# Altium PCB PDN Analyzer.PcbDoc
Units mm, origin at the board's own origin, x right, y up, seen from the top; angles counter-clockwise.
Board outline 36 x 21 mm, 4 copper layers (Top Layer, Top, Layer 1, Bottom Layer), stack 1.282 mm thick; 45 components, 30 nets, 140 pads, 90 vias.
Unrouted connection lines stored in the file: 10.
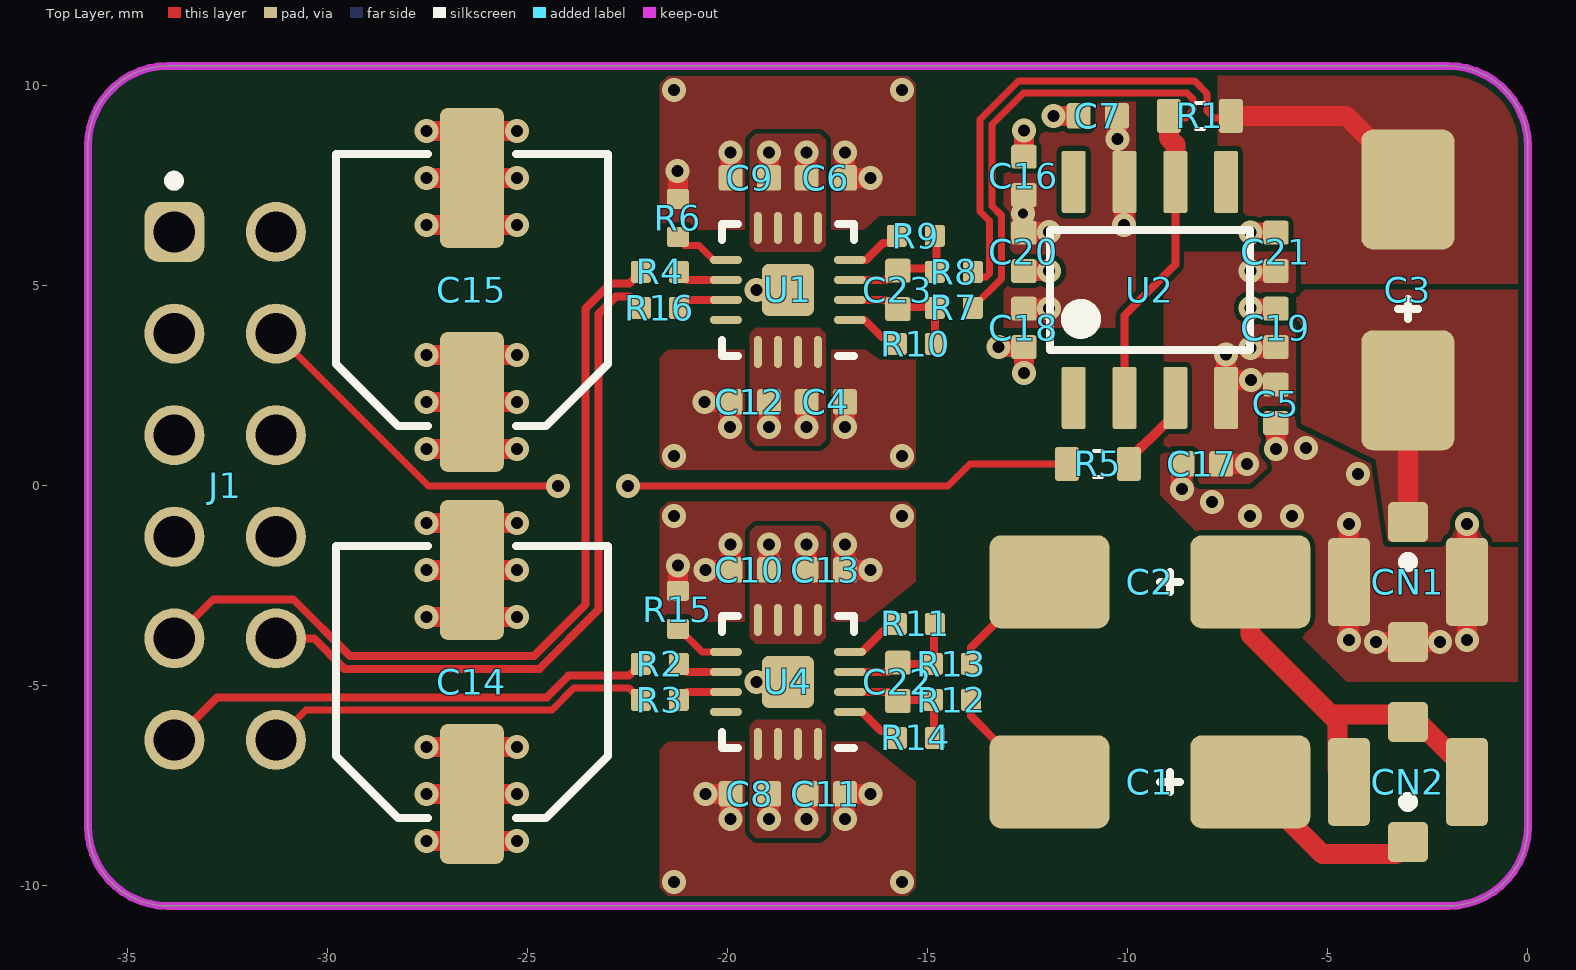
[diagram p0: Top Layer view]
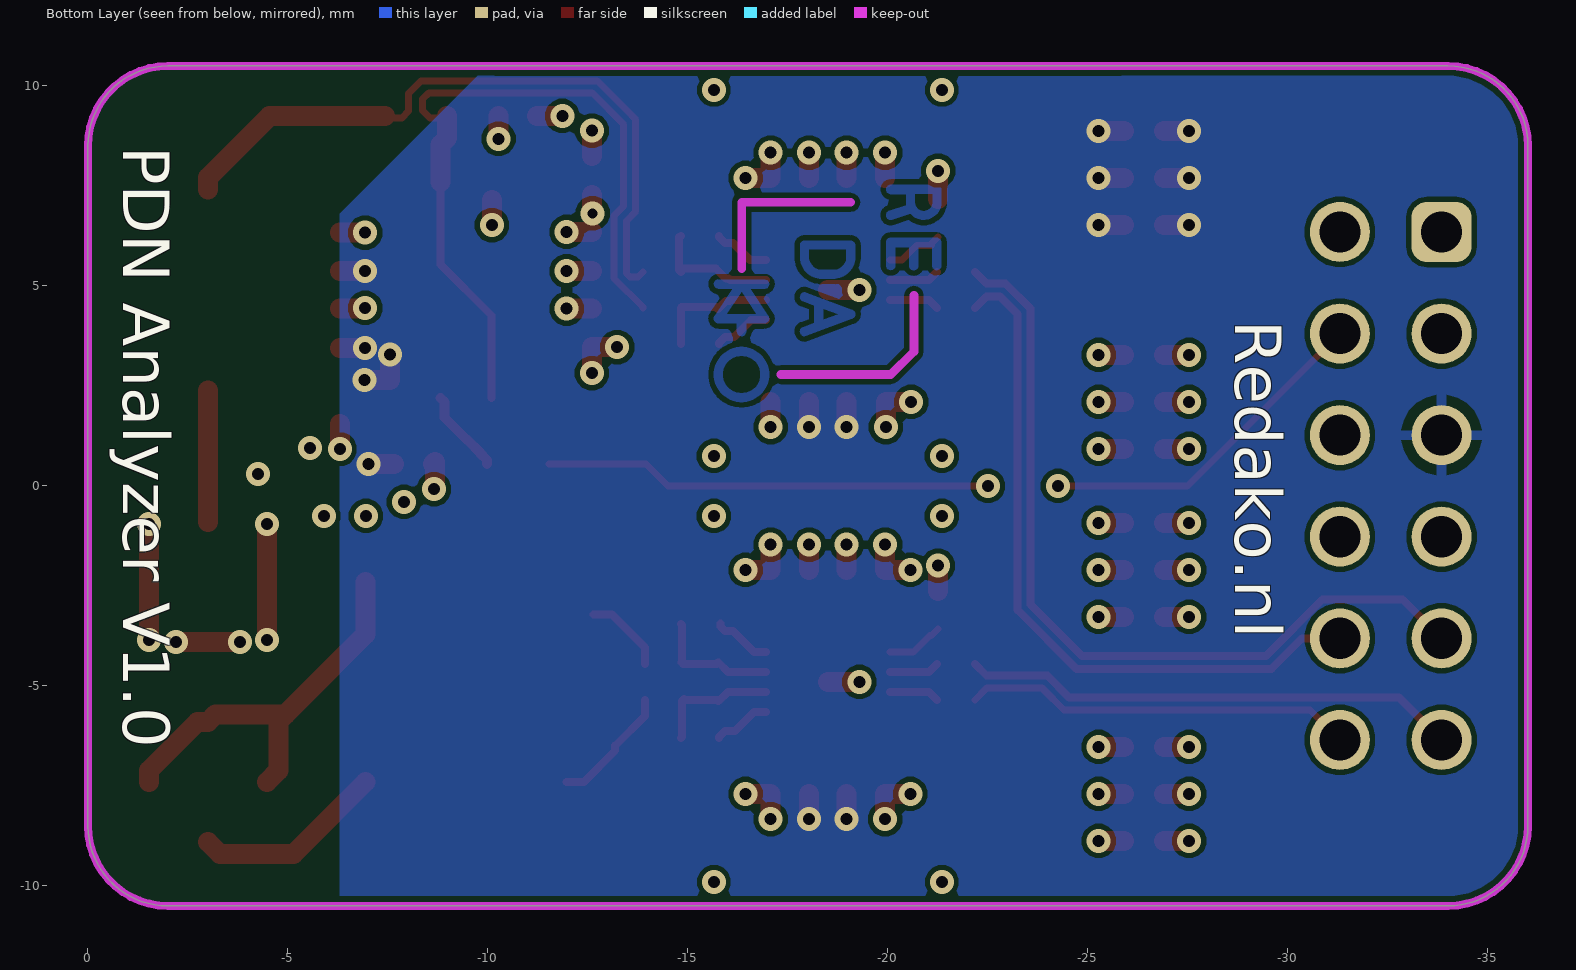
[diagram p1: Bottom Layer view, seen from below]
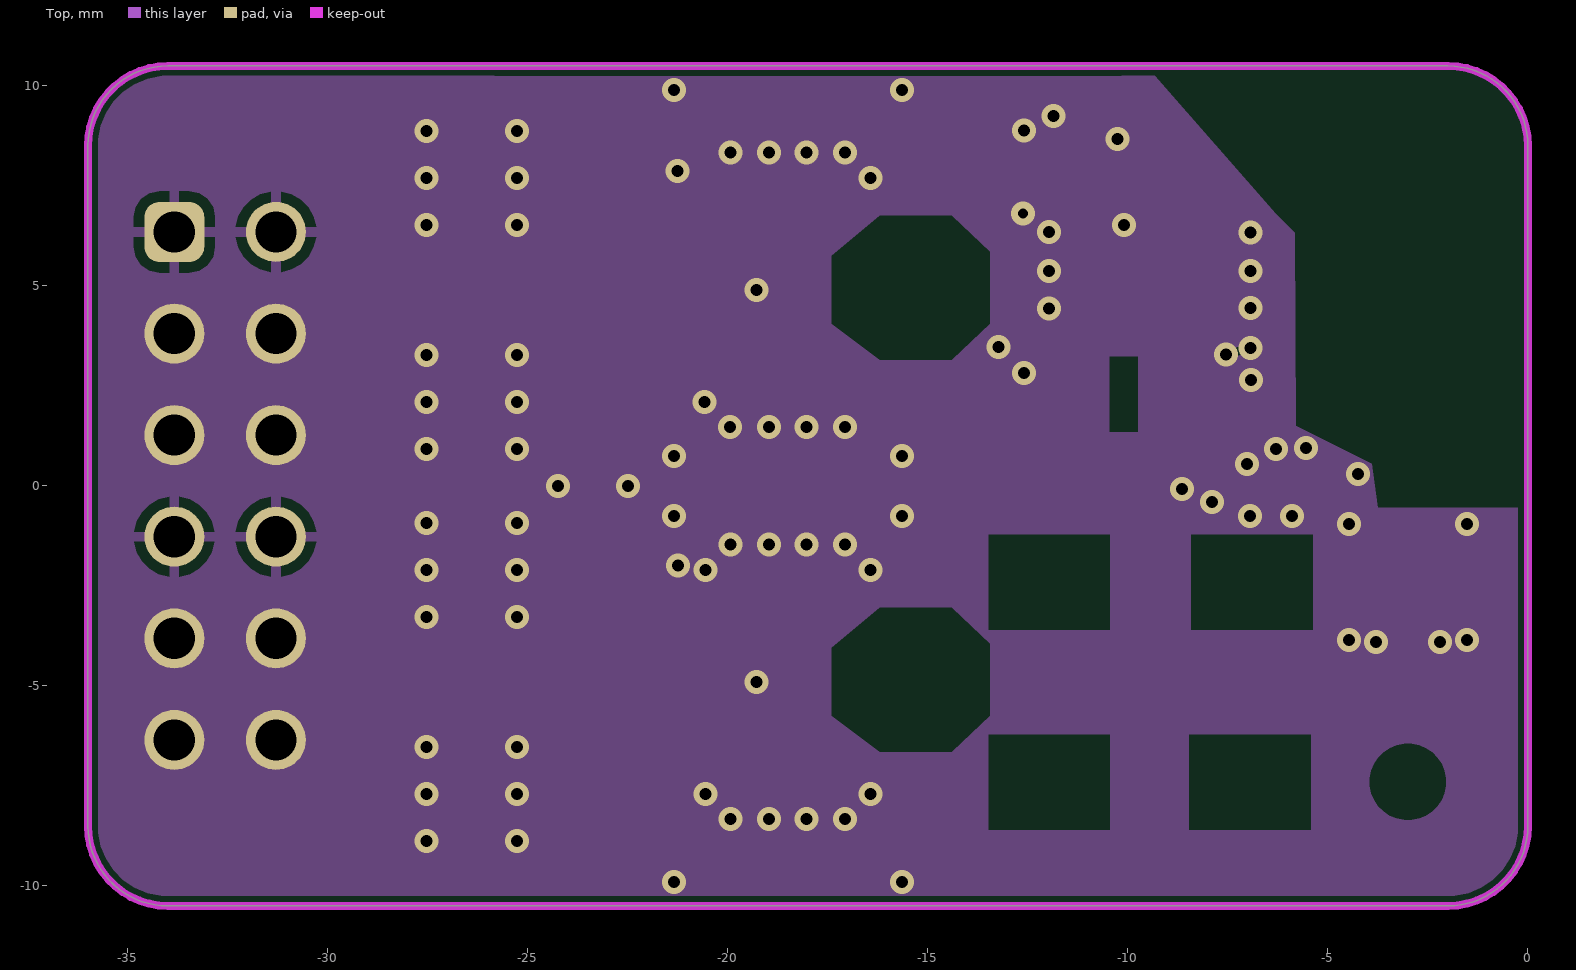
[diagram p2: Top]
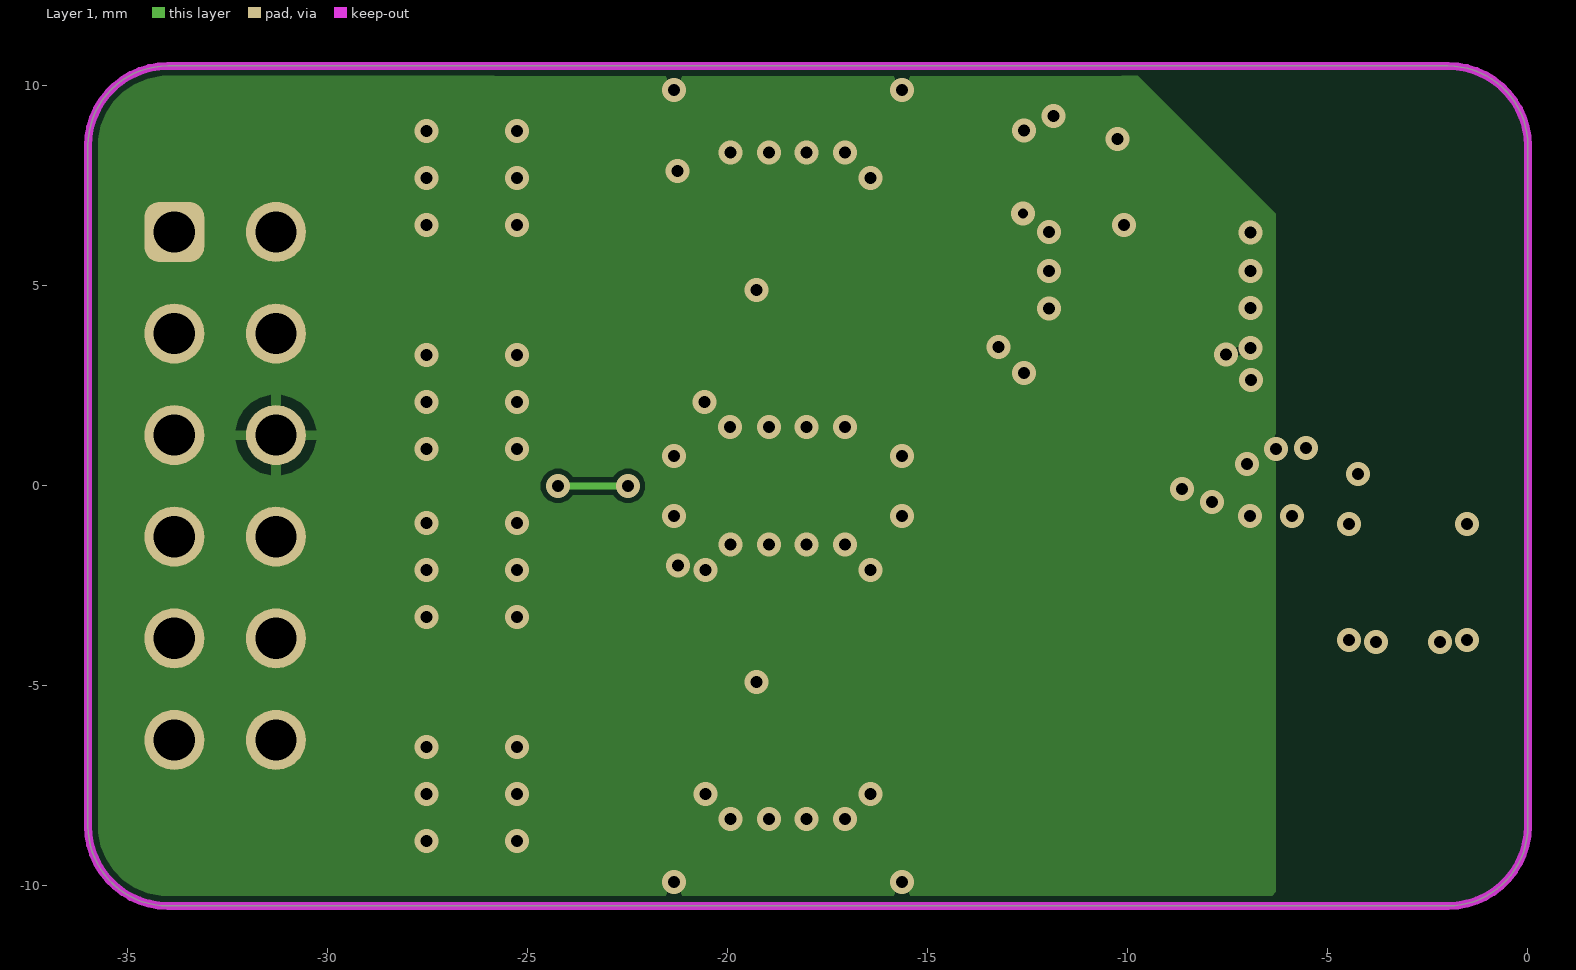
[diagram p3: Layer 1]
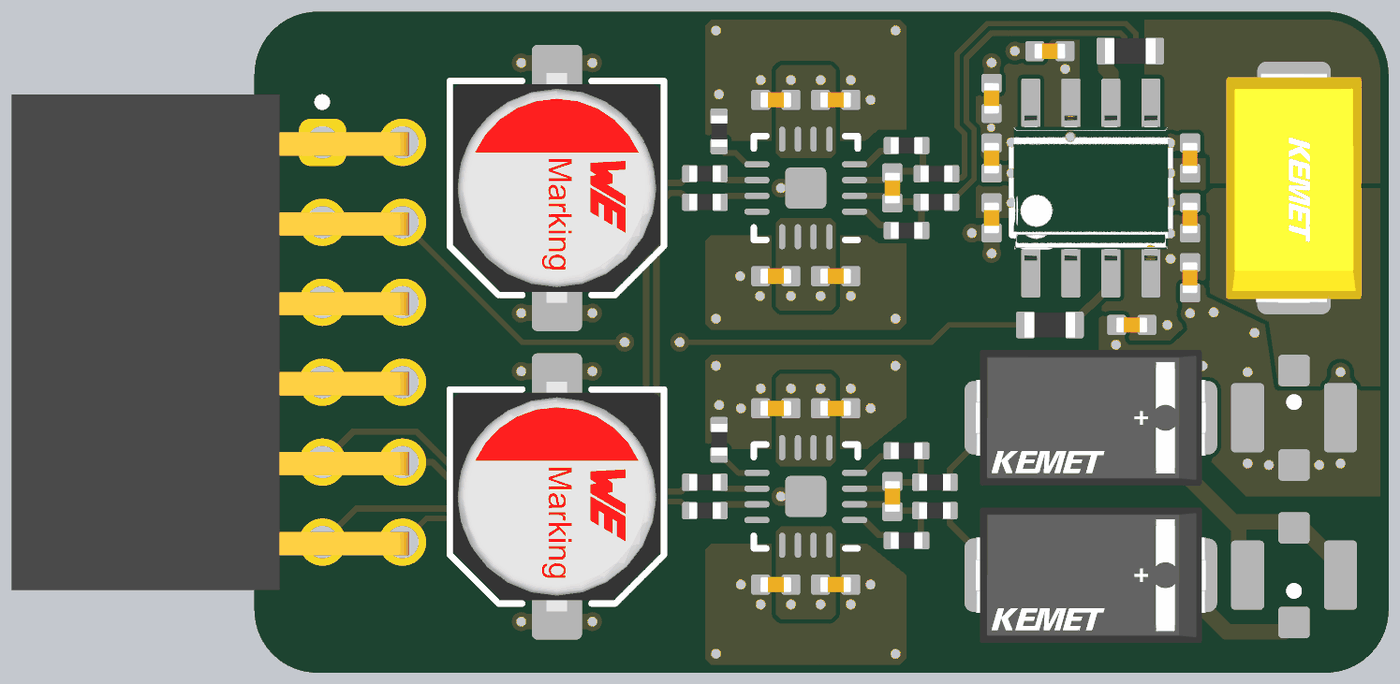
[diagram p4: 3D render of the assembled board from above, using the file's embedded part models]

## Layer stack, top to bottom
Top Solder: solder mask 0.01, Solder Resist, Dk 3.5
Top Layer: signal copper 0.035
Dielectric 2: prepreg 0.0711, PP-006, Dk 4.1
Top: signal copper 0.035
Dielectric 1: core 1, Core-009, Dk 4.5
Layer 1: signal copper 0.035
Dielectric 3: prepreg 0.0711, PP-006, Dk 4.1
Bottom Layer: signal copper 0.035
Board Layer Stack Bottom Solder: solder mask 0.01, Solder Resist, Dk 3.5

## Board outline
-36,-8.5 -36,-2.375 -36,8.5 cw(c-34,8.5) -34,10.5 -31,10.5 -2,10.5 cw(c-2,8.5) 0,8.5 0,-8.5 cw(c-2,-8.5) -2,-10.5 -3,-10.5 -34,-10.5 cw(c-34,-8.5)

## Design rules (kind name [scope] priority, off if disabled: settings)
BoardOutlineClearance mdCopperDimension [All] p1: gap=0.25 ignorepadtopadclearanceinfootprint=FALSE
Clearance [All] p1: gap=0.125 ignorepadtopadclearanceinfootprint=FALSE
ComponentClearance [All] p1: gap=0 collisioncheckmode=3 verticalgap=0 showdistances=FALSE
DiffPairsRouting [All] p1: maxlimit=0.127 minlimit=0.125 mostfreqgap=0.127 toplayer_maxgap=0.125 toplayer_minwidth=0.399 toplayer_maxwidth=0.399 toplayer_prefwidth=0.124 midlayer1_prefgap=0.125 midlayer1_minwidth=0.381 midlayer1_maxwidth=0.381 midlayer1_prefwidth=0.059 midlayer2_prefgap=0.125 midlayer2_minwidth=0.381 midlayer2_maxwidth=0.381 midlayer2_prefwidth=0.059 bottomlayer_mingap=0.127 bottomlayer_minwidth=0.406 bottomlayer_maxwidth=0.406 bottomlayer_prefwidth=0.124 impedanceprofiledriven=TRUE impedanceprofileid={3314250E-EA92-4780-AD0B-8EA7877EF3D0} impedanceprofilevalue=90.000000 maxuncoupledlength=12.7
HoleSize [All] p1: absolutevalues=TRUE maxlimit=2540 minlimit=0.25 maxpercent=80.000 minpercent=20.000
HoleToHoleClearance mdDrill [All] p1: gap=0.203 allowstackedmicrovias=TRUE
MinimumSolderMaskSliver [All] p1 off: minsoldermaskwidth=0.254
PasteMaskExpansion Expansion_SMDPaste_OFF [InPadClass('SMDPaste_OFF')] p1: expansion=0
PasteMaskExpansion mlMinCreamFrame [All] p2: expansion=0
PlaneClearance [All] p1: clearance=0.25
PolygonConnect [All] p1: thpad.connectstyle=Relief thpad.reliefconductorwidth=0.254 thpad.reliefentries=4 thpad.polygonreliefangle="90 Angle" thpad.airgapwidth=0.254 smdpad.connectstyle=Direct smdpad.reliefconductorwidth=0.254 smdpad.reliefentries=4 smdpad.polygonreliefangle="90 Angle" smdpad.airgapwidth=0.254 via.connectstyle=Direct via.reliefconductorwidth=0.254 via.reliefentries=4 via.polygonreliefangle="90 Angle" via.airgapwidth=0.254
RoutingVias [All] p1: holewidth=0.3 width=0.6 viastyle="Through Hole" minholewidth=0.25 minwidth=0.6 maxholewidth=2.54 maxwidth=2.54
SilkToSilkClearance [All] p1: silktosilkclearance=0
SilkToSolderMaskClearance [IsPad] p1: minsilkscreentomaskgap=0 clearancetoexposedcopper=TRUE
SolderMaskExpansion [isVia] p1: expansion=0.102 istentingtop=TRUE
SolderMaskExpansion mlMinStopFrame [All] p2: expansion=0 istentingtop=FALSE
Width "Width_For_NetClass_analog signal" [InNetClass('analog signal')] p1: maxlimit=0.762 minlimit=0.191 preferedwidth=0.508
Width "Width_For_NetClass_digital signal" [InNetClass('digital signal')] p2: maxlimit=0.762 minlimit=0.191 preferedwidth=0.508 midlayer2_minwidth=0 midlayer2_maxwidth=0.254 midlayer2_prefwidth=0 minimp=50.000000 maximp=50.000000 favimp=50.000000
Width Width_For_NetClass_power [InNetClass('power')] p3: maxlimit=0.61 minlimit=0.254 preferedwidth=0.305 toplayer_prefwidth=0.3 midlayer1_prefwidth=0.3 bottomlayer_prefwidth=0.3 minimp=50.000000 maximp=50.000000 favimp=50.000000
Width [All] p4: maxlimit=254 minlimit=0.125 preferedwidth=0.2 midlayer1_minwidth=0.178 midlayer2_minwidth=0.152 midlayer2_prefwidth=0.152 minimp=50.000000 maximp=50.000000 favimp=50.000000
21 further rules are at their usual default settings.

## Components (designator, comment, footprint, x,y, rotation, side; value= is the part's Value field where it differs from the comment)
C1 "C696814" FP-T521X-MFG -9.45,-7.4 r0 top value="100uF 25V 40mΩ"
C2 "C696814" FP-T521X-MFG -9.45,-2.4 r0 top value="100uF 25V 40mΩ"
C3 "C4944894" FP-T491X107K025AT-MFG -3,4.9 r270 top value="470uF 10V 45mΩ"
C4 "" CAPC1005X05N -17.55,2.1 r180 top value=2.2uF
C5 "" CAPC1005X05N -6.3,2.05 r90 top value=2.2uF
C6 "" CAPC1005X05N -17.55,7.7 r180 top value=2.2uF
C7 "" CAPC1005X05N -10.75,9.25 r0 top value=2.2uF
C8 "" CAPC1005X05N -19.45,-7.7 r0 top value=2.2uF
C9 "" CAPC1005X05N -19.45,7.7 r0 top value=2.2uF
C10 "" CAPC1005X05N -19.45,-2.1 r0 top value=2.2uF
C11 "" CAPC1005X05N -17.55,-7.7 r180 top value=2.2uF
C12 "" CAPC1005X05N -19.45,2.1 r0 top value=2.2uF
C13 "" CAPC1005X05N -17.55,-2.1 r180 top value=2.2uF
C14 "C5246508" WCAP-PSLP_D6.3H5.8 -26.4,-4.9 r270 top value="220µF 20mΩ"
C15 "C5246508" WCAP-PSLP_D6.3H5.8 -26.4,4.9 r270 top value="220µF 20mΩ"
C16 "" CAPC1005X05N -12.6,7.75 r270 top value=2.2uF
C17 "" CAPC1005X05N -8.15,0.55 r0 top value=2.2uF
C18 "" CAPC1005X05N -12.6,3.95 r90 top value=2.2uF
C19 "" CAPC1005X05N -6.3,3.95 r270 top value=2.2uF
C20 "" CAPC1005X05N -12.6,5.85 r90 top value=2.2uF
C21 "" CAPC1005X05N -6.3,5.85 r270 top value=2.2uF
C22 "" CAPC1005X05N -15.75,-4.9 r270 top value=0.5pF
C23 "" CAPC1005X05N -15.75,4.9 r270 top value=0.5pF
CN1 "C434806" MOLX-73412-0110_V -3,-2.4 r180 top
CN2 "C434806" MOLX-73412-0110_V -3,-7.4 r0 top
J1 "C5333437" 613012243121 -39.45,0 r270 top
R1 "" RESC1608X04N -8.2,9.25 r180 top value=0.5Ω
R2 "" RESC1005X04N -21.7,-4.45 r0 top value=100Ω
R3 "" RESC1005X04N -21.7,-5.35 r0 top value=100Ω
R4 "" RESC1005X04N -21.7,5.35 r0 top value=100Ω
R5 "" RESC1608X04N -10.75,0.55 r180 top value=0Ω
R6 "" RESC1005X04N -21.25,6.7 r90 top value=0Ω
R7 "" RESC1005X04N -14.35,4.45 r0 top value=1kΩ
R8 "" RESC1005X04N -14.35,5.35 r0 top value=1kΩ
R9 "" RESC1005X04N -15.3,6.25 r0 top value=10kΩ
R10 "" RESC1005X04N -15.3,3.55 r0 top value=10kΩ
R11 "" RESC1005X04N -15.3,-3.45 r0 top value=10kΩ
R12 "" RESC1005X04N -14.4,-5.35 r0 top value=1kΩ
R13 "" RESC1005X04N -14.4,-4.45 r0 top value=1kΩ
R14 "" RESC1005X04N -15.3,-6.3 r0 top value=10kΩ
R15 "" RESC1005X04N -21.25,-3.1 r90 top value=0Ω
R16 "" RESC1005X04N -21.7,4.45 r0 top value=100Ω
U1 "C468516" ADI-CP-16-2_M -18.5,4.9 r180 top
U2 "C22444686" FP-D0008A-MFG -9.45,4.9 r90 top
U4 "C468516" ADI-CP-16-2_M -18.5,-4.9 r180 top

## Footprints (in the part's own frame and the unit in brackets; to place one, negate y for a bottom-side part, rotate by r counter-clockwise, add the part's x,y. Pads: shape width x height; smd on the part's side, far side on the other; paste and mask are expansions set on the pad)
613012243121 [mm] "Socket Header, Pitch 2.54 mm, THT, Angled, dual row, 12p"
  rrect50% 1.5x1.5 hole 1.03: 1(-6.35,5.61)
  round 1.5 hole 1.03: 2(-6.35,8.15) 3(-3.81,5.61) 4(-3.81,8.15) 5(-1.27,5.61) 6(-1.27,8.15) 7(1.27,5.61) 8(1.27,8.15) 9(3.81,5.61) 10(3.81,8.15) 11(6.35,5.61) 12(6.35,8.15)
  silkscreen extent -7.75,5.48 -7.51,5.72, body extent -7.87,-4.25 7.87,8.35, height 5.05
ADI-CP-16-2_M [mm] "QFN, 16-Leads, Body 3x3mm, Pitch 0.5mm, Thermal Pad 1.3x1.3mm, IPC Low Density"
  oval 0.8x0.2 smd: 1(-1.55,0.75) 2(-1.55,0.25) 3(-1.55,-0.25) 4(-1.55,-0.75) 9(1.55,-0.75) 10(1.55,-0.25) 11(1.55,0.25) 12(1.55,0.75)
  oval 0.2x0.8 smd: 5(-0.75,-1.55) 6(-0.25,-1.55) 7(0.25,-1.55) 8(0.75,-1.55) 13(0.75,1.55) 14(0.25,1.55) 15(-0.25,1.55) 16(-0.75,1.55)
  rrect25% 1.3x1.3 smd: 17(0,0)
  silkscreen extent -1.65,-1.65 1.65,1.65, body extent -1.5,-1.5 1.5,1.5, height 1
CAPC1005X05N [mm] "0402 Chip Capacitor, 2-Leads, Body 1.00x0.50mm, IPC Medium Density"
  rrect25% 0.6x0.64 smd: 1(-0.48,0) 2(0.48,0)
  body extent -0.5,-0.25 0.5,0.25, height 0.5
FP-D0008A-MFG [mm]
  rrect17% 1.55x0.6 smd paste+0 mask+0: 1(-2.7,1.905) 2(-2.7,0.635) 3(-2.7,-0.635) 4(-2.7,-1.905) 5(2.7,-1.905) 6(2.7,-0.635) 7(2.7,0.635) 8(2.7,1.905)
  silkscreen extent -1.5,-2.5 1.5,2.5, body extent -3.57,-2.75 3.57,2.75, height 0.25
FP-T491X107K025AT-MFG [mm]
  rrect25% 3x2.33 smd paste+0 mask+0: 1(-2.51,0) 2(2.51,0)
  silkscreen extent 0.23,-0.25 0.72,0.25, body extent -4.11,-2.4 4.11,2.4, height 0.25
FP-T521X-MFG [mm]
  rrect25% 3x2.33 smd paste+0 mask+0: 1(-2.51,0) 2(2.51,0)
  silkscreen extent 0.25,-0.25 0.75,0.25, body extent -4.13,-2.42 4.13,2.42, height 0.25
MOLX-73412-0110_V [mm] "MCRF, 4-Leads, Body 2.6x2.6mm"
  rrect25% 1x1 smd: 1(0,-1.5) 3(0,1.5)
  rrect25% 1.05x2.2 smd: 2(-1.475,0) 4(1.475,0)
  silkscreen extent -0.13,-0.62 0.12,-0.38, body extent -1.3,-1.3 1.3,1.3, height 1.3
RESC1005X04N [mm] "0402 Chip Resistor, 2-Leads, Body 1.00x0.50mm, IPC Medium Density"
  rrect25% 0.5x0.55 smd: 1(-0.475,0) 2(0.475,0)
  body extent -0.5,-0.25 0.5,0.25, height 0.35
RESC1608X04N [mm] "0603 Chip Resistor, 2-Leads, Body 1.60x0.80mm, IPC Medium Density"
  rrect25% 0.6x0.85 smd: 1(-0.775,0) 2(0.775,0)
  silkscreen extent -0.1,-0.33 0.1,0.33, body extent -0.8,-0.4 0.8,0.4, height 0.45
WCAP-PSLP_D6.3H5.8 [mm] "Aluminum Polymer Capacitors, body diameter 6.3mm"
  rrect25% 3.5x1.6 smd: 1(2.8,0) 2(-2.8,0)
  silkscreen extent -3.4,-3.4 3.4,3.4, body extent -3.65,-3.3 3.65,3.3, height 5.8

## Part data
C1 C2: library part CMP-03017-000004-1, "CAP TANT POLY 100UF 25V 2917", Dielectric=Tantalum, JLCPCB=C696814
C3: library part CMP-2000-07204-2, "CAP TANT 100UF 10% 25V 2917", Dielectric=Tantalum, JLCPCB=C4944894
C4 C5 C6 C7 C8 C9 C10 C11 C12 C13 C16 C17 C18 C19 C20 C21 C22 C23: library part SMD_Cap, Package=0402
C14 C15: library part CMP-03913-53758731-1, "875105144008 WCAP-PSLP Aluminum Polymer Capacitors", Dielectric=Polymer, MPN=875105144008, JLCPCB=C5246508
CN1 CN2: library part CMP-1676-00003-1, "MCRF, PCB Vertical Jack Receptacle, 50 Ohm, 4-Pin SMD, RoHS, Tape and Reel", JLC Type=Extended, Manufacturer=Molex, MPN=73412-0110, JLCPCB=C434806
J1: library part CMP-1502-01425-3, MPN=A2541HWR-2x6P, JLCPCB=C5333437
R1 R5 R6 R15: library part Res, Package=0603
R2 R3 R4 R7 R8 R9 R10 R11 R12 R13 R14 R16: library part Res, Package=0402
U1 U4: library part CMP-1348-00001-1, "Ultralow Power, Low Distortion Fully Differential ADC Driver, 3 to 7 V, -40 to 125 degC, 16-Pin LFCSP_VQ (CP-16-2), RoHS, Reel", Manufacturer="Analog Devices", MPN=ADA4940-1ACPZ-R7, JLCPCB=C468516
U2: library part CMP-00370-145502426-1, "OPA891DR 180-MHz 0.95-nV√Hz operational amplifier with ultra-low total harmonic distortion (THD) 8-SOIC -40 to 85", Manufacturer="Texas Instruments", MPN=OPA891DR, JLCPCB=C22444686

## Via types
v1: diameter 0.6, hole 0.3, Top Layer to Bottom Layer, tented both sides, 89 vias
v2: diameter 0.6, hole 0.25, Top Layer to Bottom Layer, tented both sides, 1 vias

## Nets (pads, with @x,y where several pads share a name; then routed paths per layer and width w, separated by ;. In a path a pad name is that pad's centre, name@x,y a point inside that pad or via, vN(x,y) a via of type N, cw(c..) or ccw(c..) an arc to the next point about the centre after c; other vN are vias at no path point)
1+: J1.12 R3.1 | length 9.8
  Top Layer w0.175: J1.12 -30.549,-5.599 -29.328,-5.599 -24.399,-5.599 -23.857,-5.057 -22.468,-5.057 R3.1
1-: J1.11 R2.1 | length 12.5
  Top Layer w0.2: J1.11 -32.776,-5.286 -30.678,-5.286 -24.528,-5.286 -23.987,-4.745 -22.47,-4.745 R2.1
2+: J1.10 R16.1 | length 17.8
  Top Layer w0.2: J1.10 -30.35,-3.81 -29.585,-4.575 -29.35,-4.575 -24.875,-4.575 -24.715,-4.575 -23.258,-3.118 -23.239,-3.098 -23.239,4.299 -22.8,4.738 -22.462,4.738 R16.1
2-: J1.9 R4.1 | length 21
  Top Layer w0.2: J1.9 -32.865,-2.835 -30.865,-2.835 -29.45,-4.25 -24.85,-4.25 -23.564,-2.964 -23.564,4.433 -22.935,5.063 -22.463,5.063 R4.1
+5: C6.2 C7.2 C9.2 C10.2 C13.2 C14.1 C16.2 C18.2 C20.2 J1.6 U1.5 U1.6 U1.7 U1.8 U2.7 U4.5 U4.6 U4.7 U4.8 | length 9.2
  Top Layer w0.5: v1(-27.53,-8.875) C14.1@-26.9,-8.875 ; v1(-27.53,-7.7) C14.1@-26.9,-7.7 ; v1(-27.53,-6.525) C14.1@-26.9,-6.525 ; C14.1@-25.9,-8.875 v1(-25.27,-8.875) ; C14.1@-25.9,-7.7 v1(-25.27,-7.7) ; C14.1@-25.9,-6.525 v1(-25.27,-6.525) ; C10.2 v1(-18.97,-1.47) ; C9.2 v1(-18.97,8.33) ; C13.2 v1(-18.03,-1.47) ; C6.2 v1(-18.03,8.33) ; v2(-12.617,6.814) -12.6,6.831 C16.2 ; C18.2 v1(-11.97,4.43) ; C20.2@-12.6,6.35 v1(-11.97,6.35) ; C7.2 -10.27,8.683 v1(-10.265,8.678) ; v1(-10.1,6.52) U2.7@-10.1,7.15
-5: C4.2 C5.2 C8.2 C11.2 C12.2 C15.2 C17.2 C19.2 C21.2 J1.5 U1.13 U1.14 U1.15 U1.16 U2.4 U4.13 U4.14 U4.15 U4.16 | length 9.4
  Top Layer w0.5: v1(-27.53,6.525) C15.2@-26.9,6.525 ; v1(-27.53,7.7) C15.2@-26.9,7.7 ; v1(-27.53,8.875) C15.2@-26.9,8.875 ; C15.2@-25.9,6.525 v1(-25.27,6.525) ; C15.2@-25.9,7.7 v1(-25.27,7.7) ; C15.2@-25.9,8.875 v1(-25.27,8.875) ; v1(-18.97,-8.33) C8.2 ; v1(-18.97,1.47) C12.2 ; v1(-18.03,-8.33) C11.2 ; v1(-18.03,1.47) C4.2 ; C17.2@-7.65,0.55 v1(-7.02,0.55) ; v1(-7.55,3.28) -7.55,2.65 v1(-6.92,2.65) ; v1(-6.93,3.45) C19.2@-6.3,3.45 ; v1(-6.93,5.37) C21.2
GND: C4.1 C5.1 C6.1 C7.1 C8.1 C9.1 C10.1 C11.1 C12.1 C13.1 C14.2 C15.1 C16.1 C17.1 C18.1 C19.1 C20.1 C21.1 CN1.2 CN1.3 CN1.4 J1.1 J1.2 J1.7 J1.8 R6.2 R15.2 U1.17 U4.17 | length 32.5
  Top Layer w0.5: v1(-27.53,-3.275) C14.2@-26.9,-3.275 ; v1(-27.53,-2.1) C14.2@-26.9,-2.1 ; v1(-27.53,-0.925) C14.2@-26.9,-0.925 ; v1(-27.53,0.925) C15.1@-26.9,0.925 ; v1(-27.53,2.1) C15.1@-26.9,2.1 ; v1(-27.53,3.275) C15.1@-26.9,3.275 ; C14.2@-25.9,-3.275 v1(-25.27,-3.275) ; C14.2@-25.9,-2.1 v1(-25.27,-2.1) ; C14.2@-25.9,-0.925 v1(-25.27,-0.925) ; C15.1@-25.9,0.925 v1(-25.27,0.925) ; C15.1@-25.9,2.1 v1(-25.27,2.1) ; C15.1@-25.9,3.275 v1(-25.27,3.275) ; v1(-21.255,7.877) -21.25,7.872 R6.2 ; R15.2 v1(-21.25,-1.995) ; v1(-20.58,2.1) -19.95,2.1 v1(-19.95,1.47) ; v1(-20.56,-7.7) C8.1 v1(-19.93,-8.33) ; v1(-20.56,-2.1) C10.1 v1(-19.93,-1.47) ; C9.1 v1(-19.93,8.33) ; v1(-19.288,-4.9) U4.17 ; v1(-19.288,4.9) U1.17 ; v1(-17.07,-8.33) C11.1 v1(-16.44,-7.7) ; v1(-17.07,-1.47) C13.1 v1(-16.44,-2.1) ; v1(-17.07,1.47) C4.1 ; v1(-17.07,8.33) C6.1 v1(-16.44,7.7) ; v1(-13.23,3.47) C18.1 ; v1(-12.6,2.82) C18.1@-12.6,3.45 ; C20.1 v1(-11.97,5.37) ; C16.1@-12.6,8.25 v1(-12.6,8.88) ; v1(-11.86,9.25) C7.1 ; C17.1@-8.682,0.602 C17.1 -8.678,0.502 v1@-8.678,-0.052 ; v1(-6.93,4.45) -6.93,4.43 C19.1 ; v1(-6.93,6.33) C21.1 ; v1(-6.3,0.92) C5.1@-6.3,1.55 ; v1@-4.488,-3.85 v1@-4.463,-3.85 ; v1(-4.475,-3.85) CN1.4 v1(-4.475,-0.95) ; v1(-3.8,-3.9) CN1.3 v1(-2.2,-3.9) ; v1@-1.537,-3.85 v1@-1.513,-3.85 ; v1(-1.525,-3.85) CN1.2 v1(-1.525,-0.95)
  other v1: -21.35,-9.9 -15.65,-9.9 -21.35,-0.75 -15.65,-0.75 -6.95,-0.75 -5.9,-0.75 -7.9,-0.4 -8.65,-0.08 -4.25,0.3 -21.35,0.75 -15.65,0.75 -5.55,0.95 -21.35,9.9 -15.65,9.9
NetC1_1: C1.1 R12.2 | length 3.1
  Top Layer w0.2: R12.2 -13.925,-5.751 -13.182,-6.494 -13.182,-6.618 -12.4,-7.4 C1.1
NetC1_2: C1.2 CN2.1 | length 4.8
  Top Layer w0.5: C1.2 -5.14,-9.2 -3.3,-9.2 CN2.1
NetC2_1: C2.1 R13.2 | length 2
  Top Layer w0.2: R13.2 -13.925,-4.039 -13.1,-3.214 C2.1@-12.639,-3.214
NetC2_2: C2.2 CN2.2 CN2.3 CN2.4 | length 10.3
  Top Layer w0.5: C2.2 -6.94,-3.71 -4.94,-5.71 ; -4.759,-5.891 -4.759,-7.116 CN2.2 ; -4.75,-5.9 -4.94,-5.71 ; CN2.4 -1.525,-7.113 -2.738,-5.9 CN2.3 -3.19,-5.71 -4.759,-5.71 -4.94,-5.71
NetC3_1: C3.1 R1.1 R8.2 | length 17.1
  Top Layer w0.175: R8.2 -13.752,5.227 -13.547,5.227 -13.462,5.312 -13.462,6.626 -13.695,6.859 -13.695,9.163 -13.462,9.396 -12.737,10.121 -8.33,10.121 -8.018,9.809 -8.018,9.368 -7.85,9.2 -7.475,9.2 R1.1
  Top Layer w0.5: R1.1 -4.545,9.25 -3,7.705 C3.1
NetC3_2: C3.2 CN1.1 | length 3.3
  Top Layer w0.5: CN1.1 -3,0.54 C3.2
NetC22_1: C22.1 R11.2 R13.1 U4.3 | length 3.2
  Top Layer w0.2: U4.3 -16,-4.65 -15.77,-4.42 C22.1 -15.72,-4.45 R13.1 ; R13.1@-14.845,-4.42 -14.85,-4.415 -14.85,-3.475 R11.2
NetC22_2: C22.2 R12.1 R14.2 U4.2 | length 3.2
  Top Layer w0.2: U4.2 -16,-5.15 -15.77,-5.38 C22.2 -15.72,-5.35 R12.1 ; R12.1@-14.905,-5.325 -14.85,-5.38 -14.85,-6.275 R14.2
NetC23_1: C23.1 R8.1 R9.2 U1.3 | length 3.2
  Top Layer w0.2: U1.3 -16.949,5.149 -16.051,5.149 -16.02,5.18 -15.95,5.18 -15.7,5.43 -14.905,5.43 R8.1 -14.78,5.395 -14.78,6.229 -14.804,6.229 R9.2
NetC23_2: C23.2 R7.1 R10.2 U1.2 | length 3.1
  Top Layer w0.2: U1.2@-16.947,4.653 -16.078,4.653 -16.045,4.62 -15.95,4.62 C23.2 -15.701,4.469 -14.844,4.469 R7.1 ; R7.1@-14.846,4.408 -14.825,4.388 R10.2
NetR1_2: R1.2 R7.2 U2.2 U2.6 | length 19
  Top Layer w0.175: R7.2 -13.875,4.468 -13.155,5.188 -13.155,6.755 -13.395,6.995 -13.395,9.039 -12.613,9.821 -8.521,9.821 -8.368,9.668 -8.368,9.382 -8.55,9.2 R1.2@-8.975,9.2
  Top Layer w0.2: U2.2 -10.085,4.265 -8.815,5.535 U2.6
  Top Layer w0.5: R1.2 -8.975,8.694 -8.815,8.534 U2.6
NetR2_2: R2.2 U4.10 | length 1.3
  Top Layer w0.2: R2.2 -21.025,-4.65 U4.10
NetR3_2: R3.2 U4.11 | length 1.3
  Top Layer w0.2: R3.2 -21.025,-5.15 U4.11
NetR4_2: R4.2 U1.10 | length 1.3
  Top Layer w0.2: R4.2 -21.025,5.15 U1.10
NetR5_1: R5.1 U2.3 | length 2.1
  Top Layer w0.25: R5.1 -9.975,0.65 -9.81,0.815 -9.81,0.828 -9.488,1.15 -9.475,1.15 -8.912,1.713 -8.912,2.103 U2.3
NetR6_1: R6.1 U1.9 | length 1.5
  Top Layer w0.175: R6.1 -21.088,6.063 -21.088,6.013 -20.719,6.013 -20.357,5.65 U1.9
NetR9_1: R9.1 U1.4 | length 1.4
  Top Layer w0.2: U1.4 -16.551,5.65 -16.126,6.075 -15.925,6.075 -15.775,6.225 R9.1
NetR10_1: R10.1 U1.1 | length 1.4
  Top Layer w0.2: U1.1 -16.581,4.15 -16.156,3.725 -15.925,3.725 -15.775,3.575 R10.1
NetR11_1: R11.1 U4.4 | length 1.5
  Top Layer w0.2: U4.4 -16.65,-4.15 -16.125,-3.625 -15.925,-3.625 -15.812,-3.512 R11.1@-15.812,-3.438
NetR14_1: R14.1 U4.1 | length 1.5
  Top Layer w0.2: U4.1 -16.65,-5.65 -16.175,-6.125 -15.925,-6.125 -15.775,-6.275 R14.1
NetR15_1: R15.1 U4.9 | length 1.4
  Top Layer w0.175: R15.1 -21.088,-3.737 -21.054,-3.737 -20.642,-4.15 U4.9
NetR16_2: R16.2 U1.11 | length 1.3
  Top Layer w0.2: R16.2 -21.025,4.65 U1.11
W1: J1.4 R5.2 | length 21.6
  Top Layer w0.175: J1.4 -27.49,0 v1(-24.25,0) ; v1(-22.5,0) -14.5,0 -13.95,0.55 R5.2
  Layer 1 w0.175: v1(-24.25,0) -24.2,0.05 -24.15,0 v1(-22.5,0)
pads on no net: J1.3 U1.12 U2.1 U2.5 U2.8 U4.12

## Polygon pours and split planes (outlines as drawn)
GND on Top Layer "NONET_L-01_P-001" (solid, pour order 191): 0,-4.9 -4.53,-4.9 -9.194,-0.236 -9.194,1.431 -5.425,5.2 0,5.2
NetC3_2 on Top Layer "NONET_L-01_P-001" (solid, pour order 190): 0,4.9 0,-1.4 -3.5,-1.4 -3.8,0.65 -5.67,1.55 -5.8,4.9
NetC3_1 on Top Layer "NONET_L-01_P-001" (solid, pour order 189): -7.75,10.25 -7.75,5.05 0,5.05 0,10.25
+5 on Top Layer "NONET_L-01_P-001" (solid, pour order 186): -9.8,9.75 -9.8,3.95 -13.1,3.95 -13.1,9.75
GND on Top Layer "NONET_L-01_P-001" (solid, pour order 182): -16.6,6.4 -16.2,6.75 -15.3,6.75 -15.3,10.05 -15.5,10.25 -21.5,10.25 -21.7,10.05 -21.7,6.4
-5 on Top Layer "NONET_L-01_P-001" (solid, pour order 187): -9.1,0.05 -9.1,5.85 -5.8,5.85 -5.8,1.1 -6.95,0.05
GND on Top Layer "NONET_L-01_P-001" (solid, pour order 185): -16.2,3.15 -16.55,3.4 -21.5,3.4 -21.7,3.2 -21.7,0.6 -21.5,0.4 -15.5,0.4 -15.3,0.6 -15.3,3.15
GND on Top Layer "NONET_L-01_P-001" (solid, pour order 184): -16.55,-3.4 -15.3,-2.4 -15.3,-0.6 -15.5,-0.4 -21.5,-0.4 -21.7,-0.6 -21.7,-3.4
GND on Top Layer "NONET_L-01_P-001" (solid, pour order 183): -21.5,-6.4 -21.7,-6.6 -21.7,-10.05 -21.5,-10.25 -15.5,-10.25 -15.3,-10.05 -15.3,-7.4 -16.55,-6.4
-5 on Top Layer "NONET_L-01_P-001" (solid, pour order 181): -19.3,-8.8 -19.45,-8.65 -19.45,-6 -19.3,-5.85 -17.7,-5.85 -17.55,-6 -17.55,-8.65 -17.7,-8.8
+5 on Top Layer "NONET_L-01_P-001" (solid, pour order 180): -17.7,-1 -17.55,-1.15 -17.55,-3.8 -17.7,-3.95 -19.3,-3.95 -19.45,-3.8 -19.45,-1.15 -19.3,-1
+5 on Top Layer "NONET_L-01_P-001" (solid, pour order 179): -17.7,8.8 -17.55,8.65 -17.55,6 -17.7,5.85 -19.3,5.85 -19.45,6 -19.45,8.65 -19.3,8.8
-5 on Top Layer "NONET_L-01_P-001" (solid, pour order 178): -19.3,1 -19.45,1.15 -19.45,3.8 -19.3,3.95 -17.7,3.95 -17.55,3.8 -17.55,1.15 -17.7,1
-5 on Bottom Layer "3" (solid, remove dead copper, pour order 177): -36,-10.5 -6.3,-10.5 -6.3,6.8 -9.75,10.25 -36,10.25
no net on Bottom Layer "NONET_L04_P171" (solid, pour order 171): -19.997,7.504 ccw(c-20.067,7.413) -20.071,7.527 -21.219,7.527 -21.218,7.527 ccw(c-21.22,7.413) -21.335,7.414 -21.334,7.414 -21.334,7.412 -21.334,7.41 -21.334,7.408 -21.334,7.406 -21.334,7.404 ccw(c-21.219,7.409) -21.334,7.402 ccw(c-21.237,7.408) -21.334,7.4 ccw(c-21.25,7.407) -21.334,7.398 ccw(c-21.264,7.405) -21.333,7.394 -21.333,7.09 ccw(c-21.232,7.09) -21.333,7.085 ccw(c-20.894,7.092) -20.896,6.652 ccw(c-20.894,6.767) -20.886,6.652 ccw(c-20.896,7.09) -20.561,6.809 -20.107,6.658 ccw(c-20.065,6.759) -19.998,6.673 ccw(c-20.078,6.77) -19.953,6.764 ccw(c-20.062,6.771) -19.97,6.83 ccw(c-20.065,6.765) -20.034,6.876 -20.463,7.019 ccw(c-21.11,7.111) -20.462,7.033 ccw(c-21.026,7.101) -20.46,7.047 ccw(c-20.963,7.095) -20.459,7.061 ccw(c-20.893,7.09) -20.458,7.09 -20.458,7.298 -20.071,7.298 ccw(c-20.066,7.407) -19.974,7.347 ccw(c-20.081,7.413) -19.96,7.447 ccw(c-20.067,7.418)
no net on Bottom Layer "NONET_L04_P173" (solid, pour order 173): -15.652,5.045 cw(c-15.774,5.044) -15.67,4.98 cw(c-15.761,5.039) -15.767,4.931 -16.126,4.931 -15.681,4.264 cw(c-15.764,4.185) -15.673,4.116 cw(c-15.766,4.183) -15.784,4.07 -16.226,4.07 -16.226,3.862 cw(c-16.34,3.856) -16.249,3.787 cw(c-16.334,3.855) -16.306,3.749 cw(c-16.34,3.87) -16.406,3.763 cw(c-16.347,3.854) -16.455,3.862 -16.455,4.07 -16.898,4.07 cw(c-16.915,4.183) -17.016,4.128 cw(c-16.914,4.185) -17.031,4.186 cw(c-16.916,4.184) -17.001,4.261 -16.555,4.931 -16.914,4.931 cw(c-16.916,5.045) -17.031,5.047 cw(c-16.916,5.045) -16.914,5.16 -15.767,5.16 cw(c-15.762,5.05)
no net on Bottom Layer "NONET_L04_P172" (solid, pour order 172): -15.652,2.786 ccw(c-16.342,2.784) -16.341,3.474 ccw(c-16.339,2.784) -17.029,2.786 ccw(c-16.339,2.787) -16.341,2.097 ccw(c-16.342,2.787)
no net on Bottom Layer "NONET_L04_P169" (solid, pour order 169): 311 vertices, not listed, extent -19.183,5.181 -17.803,6.13
no net on Bottom Layer "NONET_L04_P131" (solid, pour order 131): -17.826,4.794 ccw(c-17.916,4.73) -17.881,4.834 ccw(c-17.914,4.724) -17.959,4.83 -19.094,4.404 ccw(c-19.068,4.293) -19.182,4.298 -19.183,4.298 -19.183,4.297 -19.183,4.296 ccw(c-19.063,4.29) -19.183,4.293 ccw(c-19.078,4.291) -19.183,4.29 -19.183,4.288 -19.183,4.287 ccw(c-19.159,4.287) -19.183,4.286 ccw(c-19.156,4.287) -19.183,4.285 ccw(c-19.151,4.287) -19.183,4.284 ccw(c-19.144,4.288) -19.182,4.284 -19.182,4.283 -19.182,4.282 -19.182,4.281 -19.182,4.279 -19.182,4.278 ccw(c-19.068,4.292) -19.093,4.18 -17.959,3.754 ccw(c-17.914,3.853) -17.85,3.766 ccw(c-17.927,3.865) -17.802,3.855 ccw(c-17.911,3.865) -17.817,3.921 ccw(c-17.914,3.86) -17.878,3.969 -18.163,4.076 -18.163,4.508 -17.878,4.615 ccw(c-17.91,4.719) -17.804,4.695 ccw(c-17.928,4.719)
no net on Bottom Layer "NONET_L04_P170" (solid, pour order 170): 319 vertices, not listed, extent -21.335,5.395 -19.956,6.201
no net on Board Layer Stack Bottom Solder "NONET_L01_P085" (solid): 319 vertices, not listed, extent -21.335,5.395 -19.956,6.201
no net on Board Layer Stack Bottom Solder "NONET_L01_P083" (solid): -17.826,4.794 ccw(c-17.916,4.73) -17.881,4.834 ccw(c-17.914,4.724) -17.959,4.83 -19.094,4.404 ccw(c-19.068,4.293) -19.182,4.298 -19.183,4.298 -19.183,4.297 -19.183,4.296 ccw(c-19.063,4.29) -19.183,4.293 ccw(c-19.078,4.291) -19.183,4.29 -19.183,4.288 -19.183,4.287 ccw(c-19.159,4.287) -19.183,4.286 ccw(c-19.156,4.287) -19.183,4.285 ccw(c-19.151,4.287) -19.183,4.284 ccw(c-19.144,4.288) -19.182,4.284 -19.182,4.283 -19.182,4.282 -19.182,4.281 -19.182,4.279 -19.182,4.278 ccw(c-19.068,4.292) -19.093,4.18 -17.959,3.754 ccw(c-17.914,3.853) -17.85,3.766 ccw(c-17.927,3.865) -17.802,3.855 ccw(c-17.911,3.865) -17.817,3.921 ccw(c-17.914,3.86) -17.878,3.969 -18.163,4.076 -18.163,4.508 -17.878,4.615 ccw(c-17.91,4.719) -17.804,4.695 ccw(c-17.928,4.719)
no net on Board Layer Stack Bottom Solder "NONET_L01_P086" (solid): -19.997,7.504 ccw(c-20.067,7.413) -20.071,7.527 -21.219,7.527 -21.218,7.527 ccw(c-21.22,7.413) -21.335,7.414 -21.334,7.414 -21.334,7.412 -21.334,7.41 -21.334,7.408 -21.334,7.406 -21.334,7.404 ccw(c-21.219,7.409) -21.334,7.402 ccw(c-21.237,7.408) -21.334,7.4 ccw(c-21.25,7.407) -21.334,7.398 ccw(c-21.264,7.405) -21.333,7.394 -21.333,7.09 ccw(c-21.232,7.09) -21.333,7.085 ccw(c-20.894,7.092) -20.896,6.652 ccw(c-20.894,6.767) -20.886,6.652 ccw(c-20.896,7.09) -20.561,6.809 -20.107,6.658 ccw(c-20.065,6.759) -19.998,6.673 ccw(c-20.078,6.77) -19.953,6.764 ccw(c-20.062,6.771) -19.97,6.83 ccw(c-20.065,6.765) -20.034,6.876 -20.463,7.019 ccw(c-21.11,7.111) -20.462,7.033 ccw(c-21.026,7.101) -20.46,7.047 ccw(c-20.963,7.095) -20.459,7.061 ccw(c-20.893,7.09) -20.458,7.09 -20.458,7.298 -20.071,7.298 ccw(c-20.066,7.407) -19.974,7.347 ccw(c-20.081,7.413) -19.96,7.447 ccw(c-20.067,7.418)
no net on Board Layer Stack Bottom Solder "NONET_L01_P075" (solid): -20.53,4.758 -20.53,3.407 -20.023,2.9 -17.02,2.9 cw(c-16.339,2.783) -16.341,3.474 cw(c-16.342,2.784) -15.652,2.786 cw(c-16.342,2.787) -16.341,2.097 cw(c-16.339,2.788) -17.02,2.671 -20.056,2.671 cw(c-20.07,2.785) -20.111,2.678 cw(c-20.072,2.786) -20.164,2.716 -20.712,3.264 cw(c-20.645,3.357) -20.754,3.322 cw(c-20.644,3.361) -20.76,3.361 -20.761,3.361 cw(c-20.644,3.36) -20.76,3.37 cw(c-20.656,3.361) -20.759,3.376 -20.759,4.758 cw(c-20.645,4.764) -20.737,4.833 cw(c-20.651,4.765) -20.679,4.871 cw(c-20.645,4.75) -20.579,4.857 cw(c-20.638,4.766)
no net on Board Layer Stack Bottom Solder "NONET_L01_P084" (solid): 311 vertices, not listed, extent -19.183,5.181 -17.803,6.13
no net on Board Layer Stack Bottom Solder "NONET_L01_P080" (solid): -16.226,7.068 ccw(c-16.338,7.09) -16.259,7.172 ccw(c-16.34,7.092) -16.363,7.205 -19.066,7.205 ccw(c-19.068,7.09) -19.183,7.092 ccw(c-19.068,7.09) -19.066,6.975 -16.455,6.975 -16.455,5.16 -16.914,5.16 ccw(c-16.916,5.045) -17.031,5.047 ccw(c-16.916,5.045) -16.914,4.931 -16.555,4.931 -17.001,4.261 ccw(c-16.916,4.184) -17.031,4.186 ccw(c-16.914,4.185) -17.016,4.128 ccw(c-16.915,4.183) -16.898,4.07 -16.455,4.07 -16.455,3.862 ccw(c-16.347,3.854) -16.406,3.763 ccw(c-16.34,3.87) -16.306,3.749 ccw(c-16.334,3.855) -16.249,3.787 ccw(c-16.34,3.856) -16.226,3.862 -16.226,4.07 -15.784,4.07 ccw(c-15.766,4.183) -15.673,4.116 ccw(c-15.764,4.185) -15.681,4.264 -16.126,4.931 -15.767,4.931 ccw(c-15.761,5.039) -15.67,4.98 ccw(c-15.774,5.044) -15.652,5.045 ccw(c-15.762,5.05) -15.767,5.16 -16.226,5.16
GND on Top "3" (solid, remove dead copper, pour order 176): -36,-10.5 0,-10.5 0,-0.55 -1.7,-0.55 -3.751,-0.55 -3.9,0.55 -5.802,1.501 -5.825,6.325 -6.3,6.8 -9.33,10.25 -36,10.25
+5 on Layer 1 "3" (solid, remove dead copper, pour order 138): -36,-10.5 -6.3,-10.5 -6.3,6.8 -9.75,10.25 -36,10.25

## Keep-outs
Bottom Layer:
  lines w0.217: -20.65,4.764 -20.65,3.361 -20.072,2.784 -17.325,2.784 ; -19.068,7.09 -16.344,7.09 -16.343,7.091 -16.343,5.436
Keep-Out Layer:
  the board outline again, w0.2

## Other copper
Top:
  pour cut-out: -3,-6.45 cw(c-3,-7.4) -2.05,-7.4 cw(c-3,-7.4) -3,-8.35 cw(c-3,-7.4) -3.95,-7.4 cw(c-3,-7.4)
  pour cut-out: -16.2,3.15 -17.4,4.05 -17.4,5.75 -16.2,6.75 -14.4,6.75 -13.45,5.85 -13.45,4.05 -14.4,3.15
  pour cut-out: -16.2,-6.65 -17.4,-5.75 -17.4,-4.05 -16.2,-3.05 -14.4,-3.05 -13.45,-3.95 -13.45,-5.75 -14.4,-6.65
  pour cut-out: -5.381,-3.6 -8.414,-3.6 -8.414,-1.215 -5.381,-1.215
  pour cut-out: -5.43,-8.6 -8.462,-8.6 -8.462,-6.215 -5.43,-6.215
  pour cut-out: -10.45,-8.6 -13.482,-8.6 -13.482,-6.215 -10.45,-6.215
  pour cut-out: -10.45,-3.6 -13.482,-3.6 -13.482,-1.215 -10.45,-1.215
  pour cut-out: -10.45,1.35 -10.45,3.233 -9.75,3.233 -9.75,1.35
Bottom Layer:
  pour cut-out: -18.033,5.899 -18.033,5.727 cw(c-18.347,5.725) -18.349,5.411 -18.636,5.411 cw(c-18.638,5.725) -18.952,5.727 -18.952,5.899
  pour cut-out: -16.34,3.245 ccw(c-16.342,2.788) -16.799,2.806 -16.8,2.796 -16.8,2.792 -16.8,2.789 -16.8,2.785 ccw(c-16.516,2.785) -16.8,2.778 -16.8,2.775 -16.799,2.77 -16.799,2.766 ccw(c-16.343,2.783) -16.34,2.327 ccw(c-16.339,2.784) -15.881,2.786 ccw(c-16.339,2.787)
  pour cut-out: -20.688,7.298 -21.104,7.298 -21.104,7.09 ccw(c-20.897,7.088) -20.896,6.882 ccw(c-20.894,7.088) -20.722,6.975 -20.717,6.983 -20.715,6.987 -20.712,6.991 ccw(c-20.944,7.118) -20.71,6.995 ccw(c-20.902,7.096) -20.708,6.999 ccw(c-20.877,7.083) -20.706,7.004 ccw(c-20.857,7.074) -20.702,7.013 ccw(c-20.85,7.071) -20.7,7.018 ccw(c-20.917,7.093) -20.69,7.06 ccw(c-20.897,7.09) -20.688,7.09
  pour cut-out: -15.981,4.299 -16.34,4.838 -16.7,4.299
  pour cut-out: -18.392,4.422 -18.74,4.292 -18.392,4.162

## Silkscreen, mask and mechanical layers (free items; w line width, h text height)
Board Layer Stack Bottom Overlay:
  text "PDN Analyzer V1.0" at -0.5,8.488 h2 r90
  text "Redako.nl" at -28.3,4.145 h2 r90
Board Layer Stack Bottom Solder:
  pour cut-out: -18.033,5.899 -18.033,5.727 cw(c-18.347,5.725) -18.349,5.411 -18.636,5.411 cw(c-18.638,5.725) -18.952,5.727 -18.952,5.899
  pour cut-out: -16.34,3.245 ccw(c-16.342,2.788) -16.799,2.806 -16.8,2.796 -16.8,2.792 -16.8,2.789 -16.8,2.785 ccw(c-16.516,2.785) -16.8,2.778 -16.8,2.775 -16.799,2.77 -16.799,2.766 ccw(c-16.343,2.783) -16.34,2.327 ccw(c-16.339,2.784) -15.881,2.786 ccw(c-16.339,2.787)
  pour cut-out: -20.688,7.298 -21.104,7.298 -21.104,7.09 ccw(c-20.897,7.088) -20.896,6.882 ccw(c-20.894,7.088) -20.722,6.975 -20.717,6.983 -20.715,6.987 -20.712,6.991 ccw(c-20.944,7.118) -20.71,6.995 ccw(c-20.902,7.096) -20.708,6.999 ccw(c-20.877,7.083) -20.706,7.004 ccw(c-20.857,7.074) -20.702,7.013 ccw(c-20.85,7.071) -20.7,7.018 ccw(c-20.917,7.093) -20.69,7.06 ccw(c-20.897,7.09) -20.688,7.09
  pour cut-out: -15.981,4.299 -16.34,4.838 -16.7,4.299
  pour cut-out: -18.392,4.422 -18.74,4.292 -18.392,4.162
  text "A" at -5.95,-1.48 h8 r90